# Altium PCB Funky_noground.PcbDoc
Units mm, origin at the board's own origin, x right, y up, seen from the top; angles counter-clockwise.
Board outline 41 x 58.5 mm, 2 copper layers (Top Layer, Bottom Layer); 36 components, 23 nets, 140 pads, 1 vias.
Unrouted connection lines stored in the file: 1.
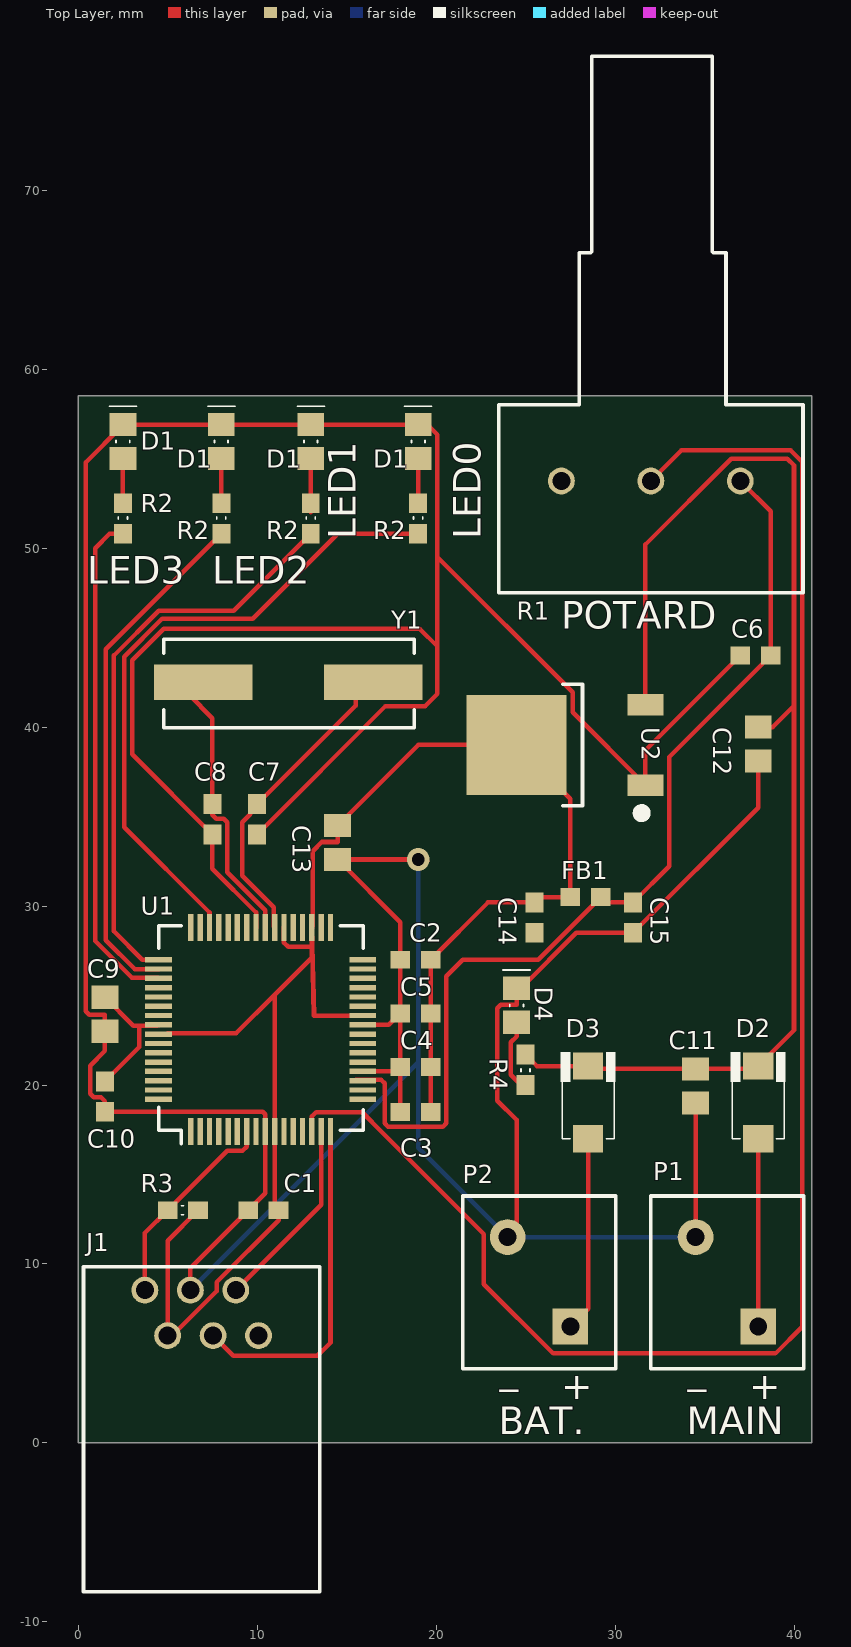
[diagram p0: Top Layer view]
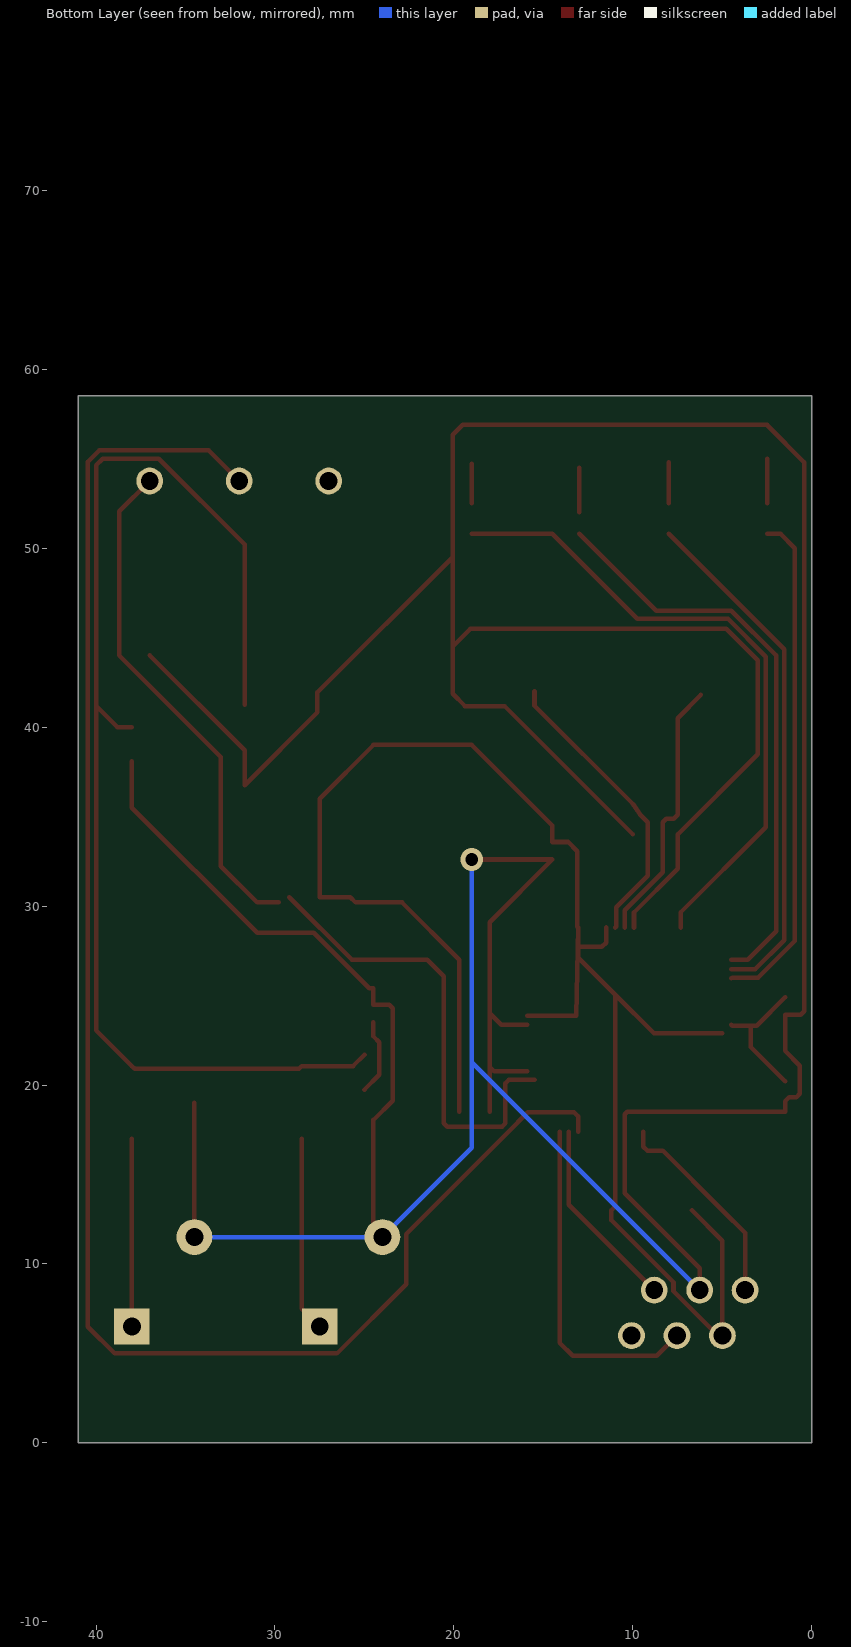
[diagram p1: Bottom Layer view, seen from below]

## Layer stack, top to bottom
Top Solder: solder mask 0.0102, Solder Resist, Dk 3.5
Top Layer: signal copper 0.0356
Dielectric 1: dielectric 0.32, FR-4, Dk 4.8
Bottom Layer: signal copper 0.0356
Bottom Solder: solder mask 0.0102, Solder Resist, Dk 3.5

## Board outline
0,0 41,0 41,58.5 0,58.5

## Design rules (kind name [scope] priority, off if disabled: settings)
Clearance [All] p1: gap=0.2
HoleSize [All] p1: absolutevalues=TRUE maxlimit=2.54 minlimit=0.3 maxpercent=80.000 minpercent=20.000
PolygonConnect [All] p1: connectstyle=Relief reliefconductorwidth=0.254 reliefentries=4 polygonreliefangle="90 Angle" airgapwidth=0.254
RoutingVias [All] p1: holewidth=0.711 width=1.27 viastyle="Through Hole" minholewidth=0.711 minwidth=1.27 maxholewidth=0.711 maxwidth=1.27
SolderMaskExpansion [All] p1: expansion=0.102
UnpouredPolygon [All] p1: allowunpoured=FALSE
Width [All] p1: maxlimit=0.3 minlimit=0.2 preferedwidth=0.254
28 further rules are at their usual default settings.

## Classes and differential pairs
channel class led: LED0 LED1 LED2 LED3
component class POWER: C11 C12 C13 C14 C15 D2 D3 D4 FB1 P1 P2 R4 U2
component class PIC: C1 C2 C3 C4 C5 C6 C7 C8 C9 C10 J1 R3 U1 Y1
component class LED3: R2
component class LED2: R2
component class LED1: R2
component class LED0: R2

## Components (designator, comment, footprint, x,y, rotation, side; value= is the part's Value field where it differs from the comment)
C1 "100nF" CAPC1608N 9.5,13 r0 top
C2 "100nF" CAPC1608N 18,27 r0 top
C3 "100nF" CAPC1608N 18,18.5 r0 top
C4 "100nF" CAPC1608N 18,21 r0 top
C5 "100nF" CAPC1608N 18,24 r0 top
C6 "100nF" CAPC1608N 37,44 r0 top
C7 "20pF" CAPC1608N 10,34 r90 top
C8 "20pF" CAPC1608N 7.5,34 r90 top
C9 "10uF 6.3V" CAPC2012N 1.5,23 r90 top
C10 "1uF 6.3V" CAPC1608N 1.5,18.5 r90 top
C11 "10uF 6.3V" CAPC2012N 34.5,19 r90 top
C12 "10uF 6.3V" CAPC2012N 38,40 r270 top
C13 "10uF 6.3V" CAPC2012N 14.5,34.5 r270 top
C14 "1uF 6.3V" CAPC1608N 25.5,28.5 r90 top
C15 "100nF" CAPC1608N 31,28.5 r90 top
D1 "Green LED" "LED 0805" 2.5,55 r90 top
D1 "Green LED" "LED 0805" 8,55 r90 top
D1 "Green LED" "LED 0805" 13,55 r90 top
D1 "Green LED" "LED 0805" 19,55 r90 top
D2 "GF1A" SMA/DO-214AC_21 38,17 r90 top
D3 "GF1A" SMA/DO-214AC_21 28.5,17 r90 top
D4 "Green LED" "LED 0805" 24.5,23.5 r90 top
FB1 "600r" INDC1608AN 27.5,30.5 r0 top
J1 "Program / Debug" RJ12_90 5,6 r0 top
P1 "12V Main" PHOENIX_1985195 38,6.5 r0 top
P2 "12V Battery" PHOENIX_1985195 27.5,6.5 r0 top
R1 "1K" PDB181-K415K-102A2 23.5,46.5 r0 top
R2 "330r" RESC1608N 2.5,52.5 r270 top
R2 "330r" RESC1608N 8,52.5 r270 top
R2 "330r" RESC1608N 13,52.5 r270 top
R2 "330r" RESC1608N 19,52.5 r270 top
R3 "4.7k" RESC1608N 5,13 r0 top
R4 "470r" RESC1608N 25,20 r90 top
U1 "PIC32MX764F128H-I/PT" QFP50P1200X1200X120-64 4.5,27 r0 top
U2 "AP1117" TD03B_N 24.5,39 r90 top
Y1 "8MHz" "HC49/4H SMX CRYSTAL" 16.5,42.5 r180 top

## Footprints (in the part's own frame and the unit in brackets; to place one, negate y for a bottom-side part, rotate by r counter-clockwise, add the part's x,y. Pads: shape width x height; smd on the part's side, far side on the other; paste and mask are expansions set on the pad)
CAPC1608N [mm]
  rect 1.1x1 smd: 1(0,0) 2(1.7,0)
CAPC2012N [mm]
  rect 1.3x1.5 smd: 1(0,0) 2(1.9,0)
"HC49/4H SMX CRYSTAL" [mm]
  rect 5.5x2 smd: 1(9.5,0) 2(0,0)
  silkscreen extent -2.29,-2.41 11.71,2.54
INDC1608AN [mm]
  rect 1.1x1 smd: 1(0,0) 2(1.7,0)
"LED 0805" [mm]
  rect 1.3x1.5 smd: 1(0,0) 2(1.9,0)
  silkscreen extent 0.89,-0.76 2.92,0.76
PDB181-K415K-102A2 [mm]
  round 1.5 hole 1: 1(13.5,7.25) 2(8.5,7.25) 3(3.5,7.25)
  silkscreen extent 0,1.02 17,30.99
PHOENIX_1985195 [mm]
  rect 2x2 hole 1: 1(0,0)
  round 2 hole 1: 2(-3.5,5)
  silkscreen extent -6,-2.35 2.54,7.3
QFP50P1200X1200X120-64 [mm]
  rect 0.3x1.5 smd: 1(1.8,-9.6) 2(2.32,-9.6) 3(2.84,-9.6) 4(3.36,-9.6) 5(3.88,-9.6) 6(4.4,-9.6) 7(4.92,-9.6) 8(5.44,-9.6) 9(5.96,-9.6) 10(6.48,-9.6) 11(7,-9.6) 12(7.52,-9.6) 13(8.04,-9.6) 14(8.56,-9.6) 15(9.08,-9.6) 16(9.6,-9.6) 33(9.6,1.8) 34(9.08,1.8) 35(8.56,1.8) 36(8.04,1.8) 37(7.52,1.8) 38(7,1.8) 39(6.48,1.8) 40(5.96,1.8) 41(5.44,1.8) 42(4.92,1.8) 43(4.4,1.8) 44(3.88,1.8) 45(3.36,1.8) 46(2.84,1.8) 47(2.32,1.8) 48(1.8,1.8)
  rect 1.5x0.3 smd: 17(11.4,-7.8) 18(11.4,-7.28) 19(11.4,-6.76) 20(11.4,-6.24) 21(11.4,-5.72) 22(11.4,-5.2) 23(11.4,-4.68) 24(11.4,-4.16) 25(11.4,-3.64) 26(11.4,-3.12) 27(11.4,-2.6) 28(11.4,-2.08) 29(11.4,-1.56) 30(11.4,-1.04) 31(11.4,-0.52) 32(11.4,0) 49(0,0) 50(0,-0.52) 51(0,-1.04) 52(0,-1.56) 53(0,-2.08) 54(0,-2.6) 55(0,-3.12) 56(0,-3.64) 57(0,-4.16) 58(0,-4.68) 59(0,-5.2) 60(0,-5.72) 61(0,-6.24) 62(0,-6.76) 63(0,-7.28) 64(0,-7.8)
  silkscreen extent 0,-10.29 11.43,1.91
RESC1608N [mm]
  rect 1.1x1 smd: 1(0,0) 2(1.7,0)
  silkscreen extent 0.76,-0.25 0.89,0.25
RJ12_90 [mm]
  round 1.5 hole 1: 1(-1.27,2.54) 2(0,0) 3(1.27,2.54) 4(2.54,0) 5(3.81,2.54) 6(5.08,0)
  silkscreen extent -4.7,-14.32 8.51,3.84
SMA/DO-214AC_21 [mm]
  rect 1.52x1.68 smd: 1(0,0) 2(4.06,0)
  silkscreen extent 0,-1.52 4.83,1.52
TD03B_N [mm]
  rect 1.2x2 smd: 1(-2.25,-7.2) 3(2.25,-7.2)
  rect 5.6x5.6 smd: 4(0,0)
  silkscreen extent -4.19,-7.37 3.4,-2.57

## Part data
C1 C2 C3 C4 C5 C6 C7 C8 C9 C10 C11 C12 C13 C14 C15: library part Cap, "Capacitor"
D1 D1 D1 D1 D4: library part LED0, "Typical INFRARED GaAs LED"
D2 D3: library part Diode, "Default Diode"
FB1: library part Inductor, "Inductor"
J1: library part "Header 6", "Header, 6-Pin"
P1 P2: library part "Header 2", "Header, 2-Pin"
R1: library part "RPot SM", "Potentiometer"
R2 R2 R2 R2 R3 R4: library part Res1, "Resistor"
U1: "PIC32MX764F128H"
U2: "1A LDO, 18V input, DPAK"
Y1: library part XTAL, "Crystal Oscillator"

## Via types
v1: diameter 1.27, hole 0.711, Top Layer to Bottom Layer, 1 vias

## Nets (pads, with @x,y where several pads share a name; then routed paths per layer and width w, separated by ;. In a path a pad name is that pad's centre, name@x,y a point inside that pad or via, vN(x,y) a via of type N, cw(c..) or ccw(c..) an arc to the next point about the centre after c; other vN are vias at no path point)
ALIM: D2.1 P1.1 | length 10.5
  Top Layer w0.254: P1.1 D2.1
BATTERY: D3.1 P2.1 | length 10.9
  Top Layer w0.254: P2.1 28.5,7.5 D3.1
GND: C1.1 C2.1 C3.1 C4.1 C5.1 C6.1 C7.1 C8.1 C9.1 C10.1 C11.1 C12.2 C13.2 C14.1 C15.1 D1.2 D4.2 J1.3 P1.2 P2.2 U1.9 U1.20 U1.25 U1.41 U2.1 | length 290.4
  Top Layer w0.254: J1.3 6.27,9.77 C1.1 10.46,13.96 U1.9 10.46,18.358 10.318,18.5 C10.1 1.5,19.101 1.278,19.323 0.865,19.323 0.673,19.515 0.673,21.077 1.5,21.904 C9.1 1.5,23.923 0.615,23.923 0.423,24.115 0.423,54.785 2.5,56.862 2.5,56.9 8,56.9 13,56.9 19,56.9 19.5,56.9 20.077,56.323 20.077,49.485 ; U1.41 9.94,29.642 7.5,32.082 C8.1 3.025,38.475 3.025,43.741 4.784,45.5 19.078,45.5 20.077,44.501 ; C7.1 17.173,41.173 19.385,41.173 20.077,41.865 20.077,44.501 ; U1.20 17.76,20.76 C4.1 ; U1.25 17.36,23.36 C5.1 ; C3.1 C4.1 ; v1@19.5,32.5 v1(19,32.6) C13.2 18,29.1 C2.1 C5.1 ; P2.2 24.5,12 24.5,18.046 23.423,19.123 23.423,24.285 23.615,24.477 24.5,24.477 D4.2 24.742,25.4 27.842,28.5 C15.1 38,35.5 C12.2 ; P1.2 C11.1 ; C6.1 31.7,38.7 U2.1 27.627,40.823 27.627,41.935 20.077,49.485 ; C4.1 C5.1 ; 20.077,44.501 20.077,49.485
  Bottom Layer w0.254: J1.3 9.23,11.5 19,21.27 ; v1(19,32.6) 19,21.27 ; P1.2 P2.2 19,16.5 19,21.27
LED0: R2.2@19,50.8 U1.46 | length 36.4
  Top Layer w0.254: U1.46 7.34,29.642 2.571,34.411 2.571,43.929 4.688,46.046 9.758,46.046 14.513,50.8 R2.2@19,50.8
LED1: R2.2@13,50.8 U1.49 | length 32.4
  Top Layer w0.254: U1.49 3.588,27 2.002,28.586 2.002,44.002 4.5,46.5 8.7,46.5 R2.2@13,50.8
LED2: R2.2@8,50.8 U1.50 | length 29
  Top Layer w0.254: U1.50 3.162,26.48 1.548,28.094 1.548,44.348 R2.2@8,50.8
LED3: R2.2@2.5,50.8 U1.51 | length 28.2
  Top Layer w0.254: R2.2@2.5,50.8 1.754,50.8 0.954,50 0.954,28.046 2.997,26.003 4.457,26.003 U1.51
MCLR: J1.1 R3.1 U1.7 | length 11.7
  Top Layer w0.254: J1.1 3.73,11.73 R3.1 8.323,16.323 9.185,16.323 9.42,16.558 U1.7
NetC9_2: C9.2 C10.2 U1.56 | length 7.6
  Top Layer w0.254: C10.2 3.423,22.123 3.423,23.317 ; C9.2 3.083,23.317 3.423,23.317 ; U1.56 4.457,23.317 3.423,23.317
NetD1_LED0_1: D1.1@19,55 R2.1@19,52.5 | length 2.2
  Top Layer w0.254: R2.1@19,52.5 D1.1@19,54.7
NetD1_LED1_1: D1.1@13,55 R2.1@13,52.5 | length 2.5
  Top Layer w0.254: R2.1@13,52 D1.1@13,54.5
NetD1_LED2_1: D1.1@8,55 R2.1@8,52.5 | length 2.3
  Top Layer w0.254: R2.1@8,52.5 D1.1@8,54.8
NetD1_LED3_1: D1.1@2.5,55 R2.1@2.5,52.5 | length 2.5
  Top Layer w0.254: R2.1@2.5,52.5 D1.1@2.5,55
NetD4_1: D4.1 R4.1 | length 4.2
  Top Layer w0.254: D4.1 24.5,22.712 24.173,22.385 24.173,20.573 R4.1@25,19.746
NetR1_2: R1.2 U1.14 | length 93.9
  Top Layer w0.254: U1.14 13.06,18.242 13.295,18.477 15.869,18.477 17,17.345 22.673,11.672 22.673,8.865 26.538,5 38.962,5 40.454,6.492 40.454,54.812 39.812,55.454 33.704,55.454 R1.2
PGC: J1.5 U1.15 | length 10.8
  Top Layer w0.254: J1.5 13.58,13.31 U1.15
PGD: J1.4 U1.16 | length 19.1
  Top Layer w0.254: J1.4 8.671,4.869 13.369,4.869 14.1,5.6 U1.16
V3P3: C1.2 C2.2 C3.2 C4.2 C5.2 C13.1 C14.2 FB1.1 J1.2 R3.2 U1.10 U1.26 U1.35 U1.38 U1.57 U2.4 | length 97.4
  Top Layer w0.254: U1.57@5,22.883 8.823,22.883 10.98,25.04 ; R3.2 5,11.3 J1.2 5.253,6 7.733,8.48 7.733,8.986 11.2,12.453 C1.2 10.98,13.22 U1.10 10.98,25.04 ; U1.38 11.5,27.958 11.735,27.723 13.06,27.723 ; U1.26 13.18,23.88 U1.35 ; C3.2 C4.2 C5.2 C2.2 22.9,30.2 C14.2 25.8,30.5 FB1.1 27.5,36 U2.4 19,39 C13.1 14.5,33.577 13.615,33.577 13.103,33.065 13.103,28.843 U1.35 ; 10.98,25.04 13.06,27.12 13.06,27.723 ; 13.06,27.723 U1.35
V3P3A: C6.2 C15.2 FB1.2 R1.1 U1.19 | length 54.9
  Top Layer w0.254: U1.19@15.5,20.283 16.937,20.283 17.123,20.097 17.123,17.865 17.315,17.673 20.385,17.673 20.577,17.865 20.577,26.077 21.5,27 25.7,27 FB1.2 ; 29.8,30.2 C15.2 33.027,32.227 33.027,38.327 C6.2 38.7,52.05 R1.1
V5: C11.2 C12.1 D2.2 D3.2 R4.2 U2.3 | length 69.7
  Top Layer w0.254: R4.2 25.64,21.06 D3.2 28.66,20.9 C11.2 37.84,20.9 D2.2 40,23.06 40,41.189 ; U2.3 31.7,50.2 36.5,55 39.624,55 40,54.624 40,41.189 ; C12.1 38.811,40 40,41.189
VCC: R1.3
X1: C7.2 U1.39 Y1.2 | length 16.5
  Top Layer w0.254: U1.39 10.937,28.843 10.937,29.93 9.173,31.694 9.173,34.685 9.611,35.123 C7.2 15.5,41.2 Y1.2@15.5,42
X2: C8.2 U1.40 Y1.1 | length 15
  Top Layer w0.254: Y1.1@6.2,41.8 7.5,40.5 C8.2 7.5,35.099 7.722,34.877 8.135,34.877 8.327,34.685 8.327,31.897 10.46,29.764 U1.40
pads on no net: J1.6 U1.1 U1.2 U1.3 U1.4 U1.5 U1.6 U1.8 U1.11 U1.12 U1.13 U1.17 U1.18 U1.21 U1.22 U1.23 U1.24 U1.27 U1.28 U1.29 U1.30 U1.31 U1.32 U1.33 U1.34 U1.36 U1.37 U1.42 U1.43 U1.44 U1.45 U1.47 U1.48 U1.52 U1.53 U1.54 U1.55 U1.58 U1.59 U1.60 U1.61 U1.62 U1.63 U1.64

## Silkscreen, mask and mechanical layers (free items; w line width, h text height)
Top Overlay:
  text "LED1" at 15.5,50.5 h1.52 r90
  text "LED0" at 22.5,50.5 h1.52 r90
  text "LED3" at 0.5,48 h1.52
  text "LED2" at 7.5,48 h1.52
  text "POTARD" at 27,45.5 h1.52
  text "BAT." at 23.5,0.5 h1.52
  text "MAIN" at 34,0.5 h1.52

## Text inside footprints (layer, text, board x,y; h text height)
P1: Top Overlay "_" at 34.063,3.325 h1.52; Top Overlay "+" at 37.492,2.436 h1.52
P2: Top Overlay "_" at 23.563,3.325 h1.52; Top Overlay "+" at 26.992,2.436 h1.52